# EAGLE board relais (EAGLE 7.7.0)
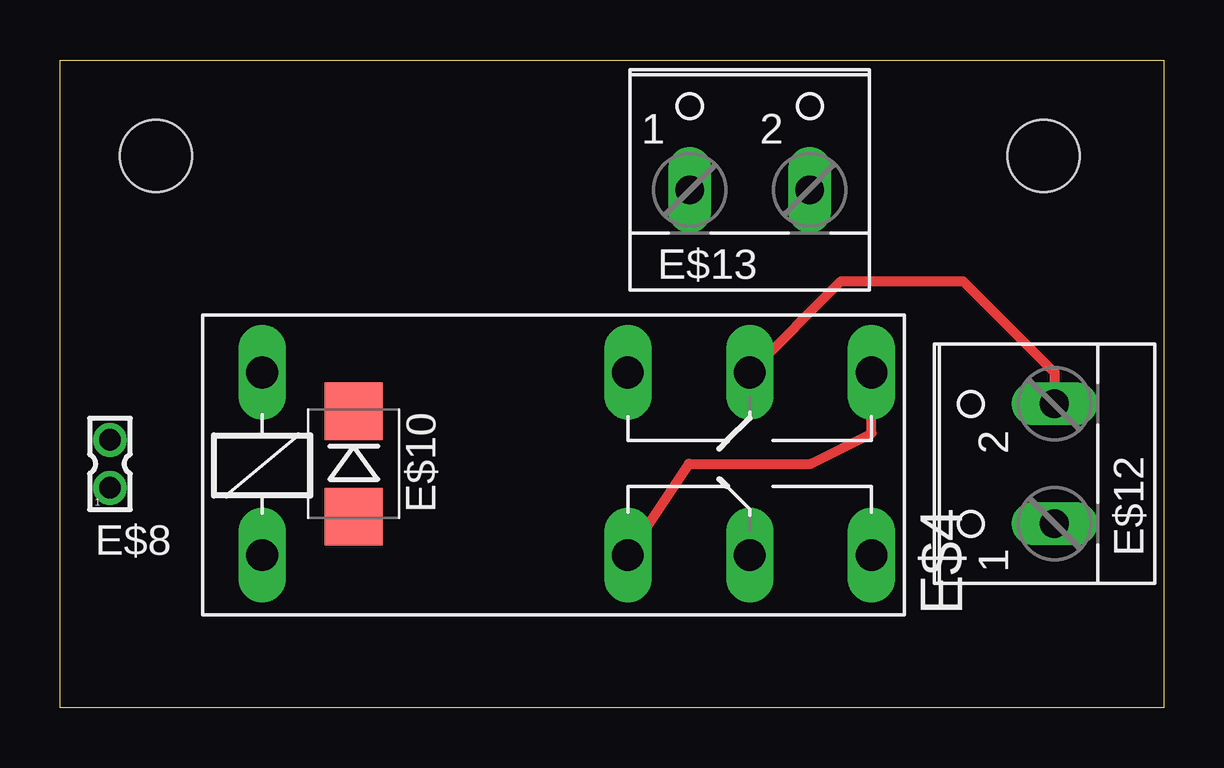
[diagram p0: board, top side]
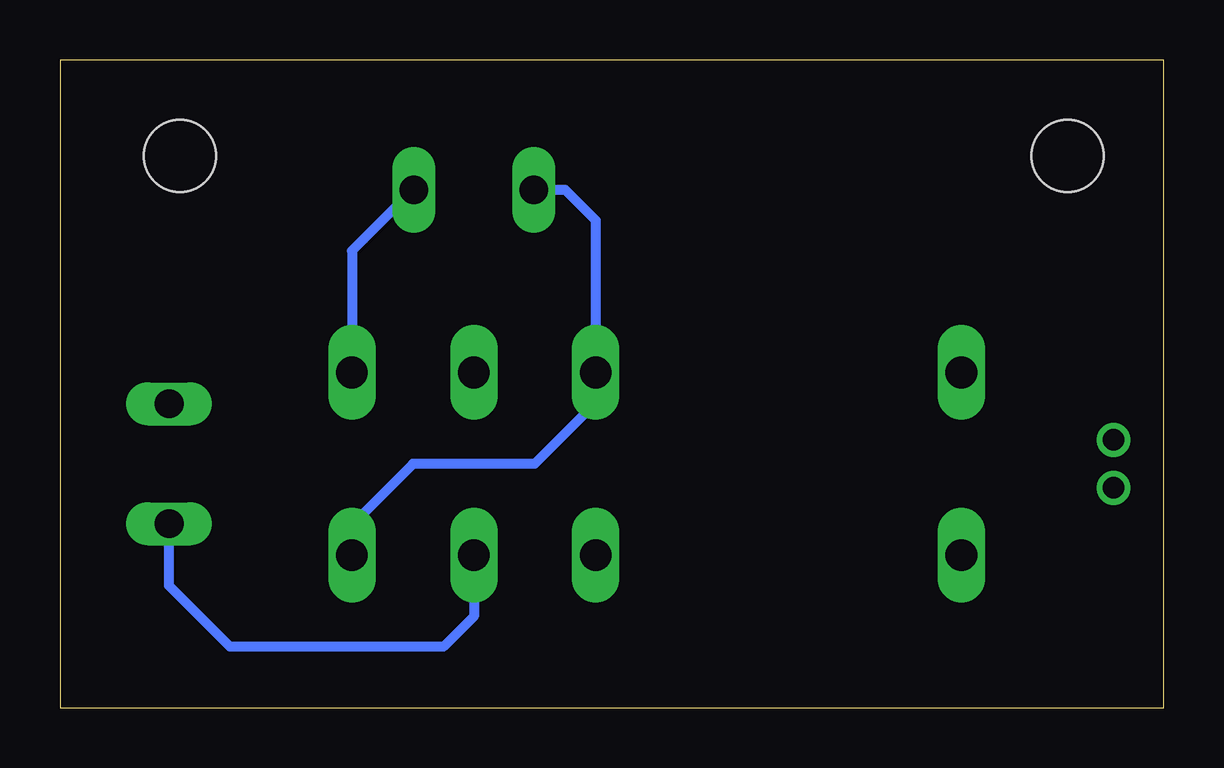
[diagram p1: board, bottom side, seen from below]

Size 46 x 27 mm. Coordinates in mm from the lower left corner, seen from the top.
Outline: 0,0 0,27 46,27 46,0 0,0
Copper layers (1*16): Top 0.035mm / dielectric 1.5mm / Bottom 0.035mm
Design rules "default": minimum track width 10mil, minimum drill 24mil, track to track 8mil, track to pad 8mil, pad to pad 8mil, via to via 8mil, smd to smd 8mil, copper to edge 40mil, drill to drill 8mil, minimum pad ring 10mil, minimum via ring 8mil, stop-mask expansion 4mil, vias tented up to drill 0mil, thermal gap 10mil
Holes 3 mm at 41,23 4,23

## Footprints (pad centres in the part's own frame; a part is rotated, then mirrored left to right if it is on the bottom)
F4052 = drill 1.321 long: 1 -3.81,3.81; 2 -3.81,-3.81; O1 11.43,-3.81; O2 11.43,3.81; P1 16.51,-3.81; P2 16.51,3.81; S1 21.59,-3.81; S2 21.59,3.81
332-02 = drill 0.9 pad 1.27: 1 0,-1; 2 0,1
SMB = smd 2.4 x 2.4: 1 -2.2,0; 2 2.2,0
W237-102 = drill 1.194 long: 1 -2.5,-1.27; 2 2.5,-1.27

## Placement (x,y rotation side)
E$4  [F4052]  12.24,10.16 0 top
E$8  [332-02]  2.08,10.16 0 top
E$10  [SMB]  12.24,10.16 270 top
E$12  [W237-102]  40.18,10.16 90 top
E$13  [W237-102]  28.75,22.86 0 top

## Library data of the parts
E$4 = relay
E$8 = con-garry
E$10 = smd-ipc
E$12 E$13 = con-wago-500

## Nets
S$5: E$4.O1 E$4.S2
S$9: E$4.O2 E$4.S1
S$10: E$4.P1
S$11: E$4.P2

## Tracks (layer width: path | path; a pad name or v marks a point on that pad's centre or on a via)
S$5
  Top 0.406: E$4.O1 26.21,10.16 31.29,10.16 33.83,11.43 E$4.S2
  Bottom 0.406: 31.29,21.59 33.83,19.05 E$4.S2
S$9
  Bottom 0.406: 26.21,21.59 24.94,21.59 23.67,20.32 E$4.O2 23.67,12.7 26.21,10.16 31.29,10.16 33.83,7.62 E$4.S1
S$10
  Bottom 0.406: E$4.P1 28.75,3.81 30.02,2.54 38.91,2.54 41.45,5.08 41.45,7.62
S$11
  Top 0.406: E$4.P2 32.56,17.78 37.64,17.78 41.45,13.97 41.45,12.7